# Altium PCB ife19_TS_Charger.PcbDoc
Units mm, origin at the board's own origin, x right, y up, seen from the top; angles counter-clockwise.
Board outline 49.3 x 31.29 mm, 2 copper layers (Top Layer, Bottom Layer); 23 components, 18 nets, 89 pads, 34 vias.
Unrouted connection lines stored in the file: 3.
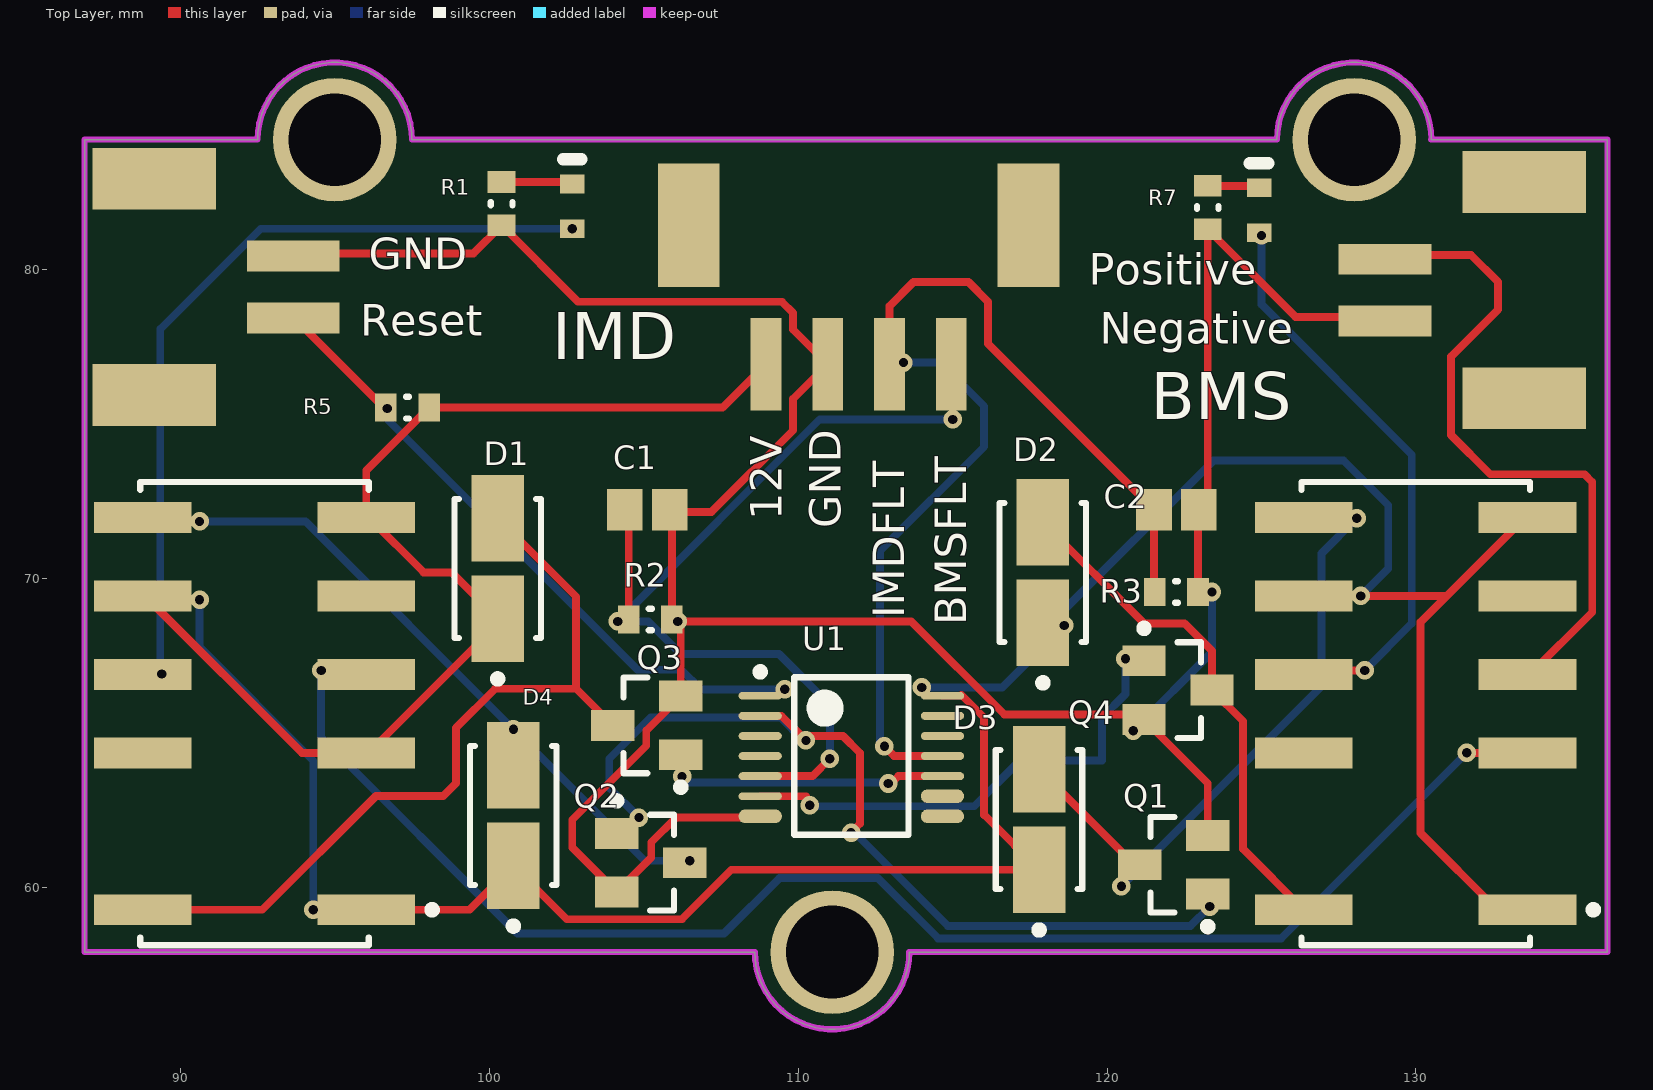
[diagram p0: Top Layer view]
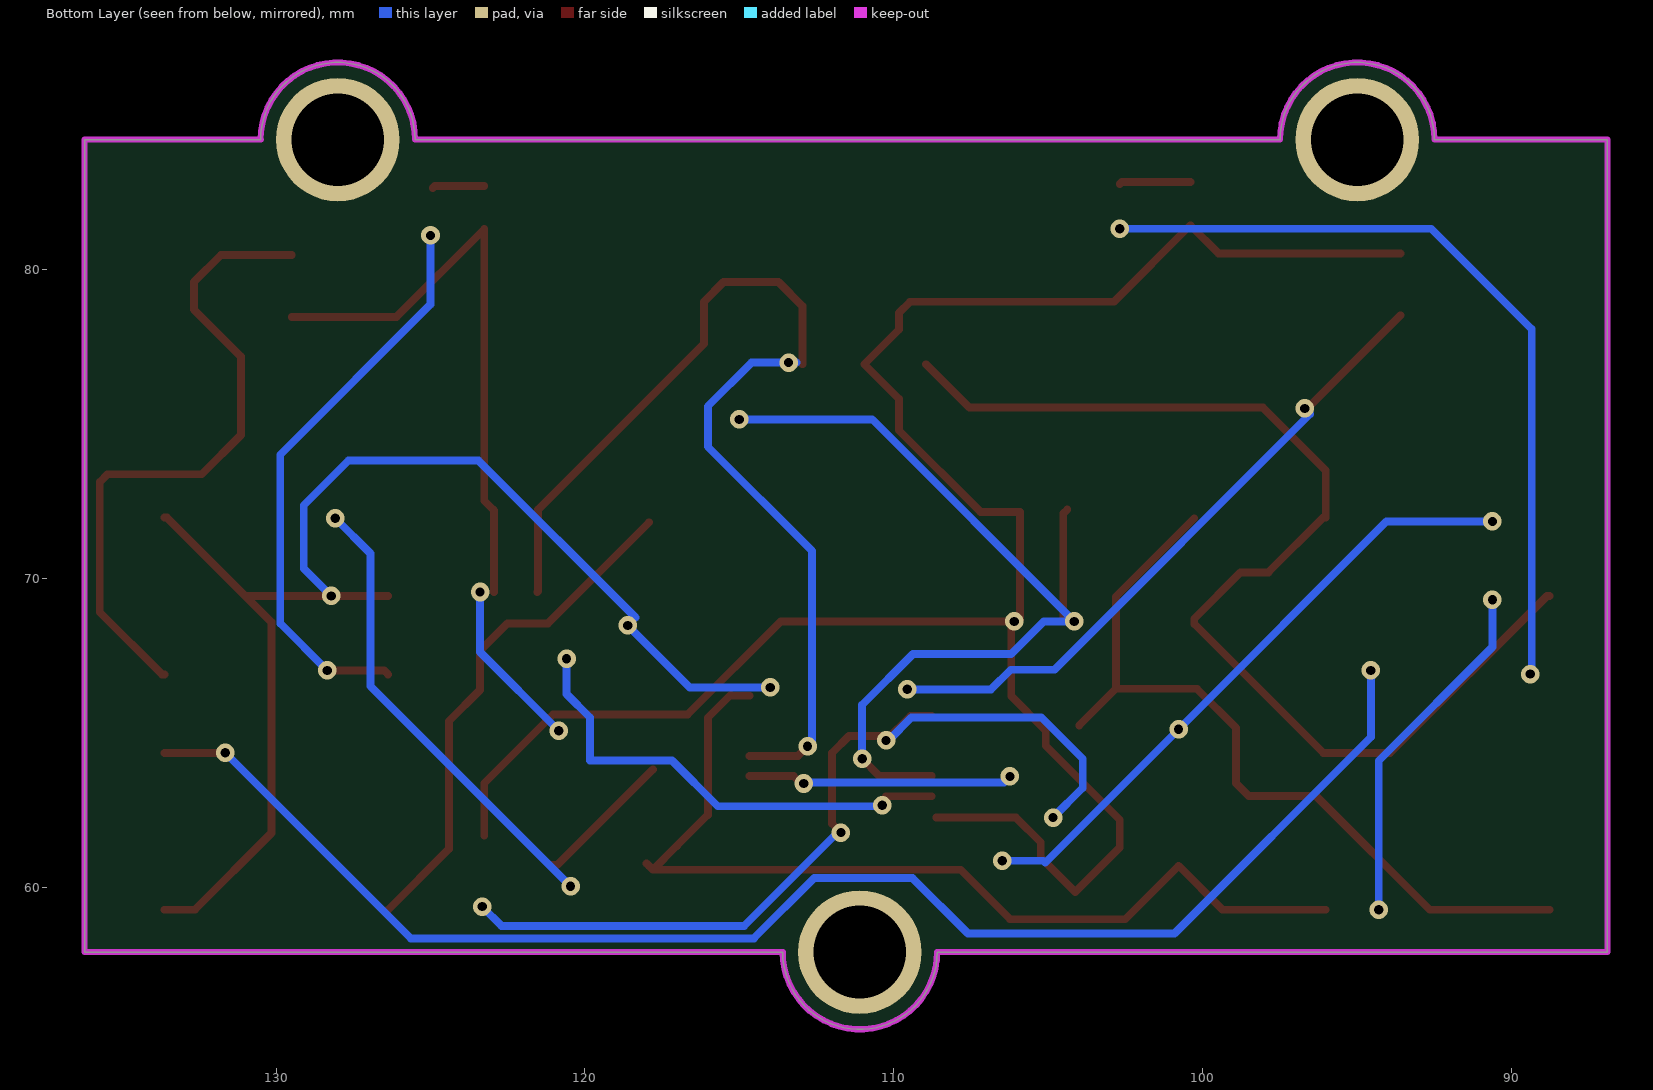
[diagram p1: Bottom Layer view, seen from below]

## Layer stack, top to bottom
Top Solder: solder mask 0.0102, Solder Resist, Dk 3.5
Top Layer: signal copper 0.0356
Dielectric 1: dielectric 0.32, FR-4, Dk 4.8
Bottom Layer: signal copper 0.0356
Bottom Solder: solder mask 0.0102, Solder Resist, Dk 3.5

## Board outline
86.9,57.9 86.9,84.2 92.5,84.2 cw(c95,84.2) 97.5,84.2 125.5,84.2 cw(c128,84.2) 130.5,84.2 136.2,84.2 136.2,57.9 113.6,57.9 cw(c111.1,57.9) 108.6,57.9

## Design rules (kind name [scope] priority, off if disabled: settings)
BoardOutlineClearance [All] p1: gap=0.2 ignorepadtopadclearanceinfootprint=FALSE
Clearance [All] p1: gap=0.152 ignorepadtopadclearanceinfootprint=FALSE
HoleSize [All] p1: absolutevalues=TRUE maxlimit=5 minlimit=0.3 maxpercent=80.000 minpercent=20.000
MinimumAnnularRing [All] p1: minimumring=0.076
PolygonConnect [All] p1: connectstyle=Relief reliefconductorwidth=0.254 reliefentries=4 polygonreliefangle="90 Angle" airgapwidth=0.254
RoomDefinition ife19_TS_Charger [InComponentClass('ife19_TS_Charger')] p1: confinementstyle=ConfineIn formatcopy=TRUE lockcomponents=FALSE outline 86.876,57.928 136.152,57.928 136.152,84.074 86.876,84.074
RoutingVias [All] p1: holewidth=0.711 width=1.27 viastyle="Through Hole" minholewidth=0.3 minwidth=0.6 maxholewidth=0.3 maxwidth=0.6
SolderMaskExpansion [All] p1: expansion=0.102
Width [All] p1: maxlimit=0.254 minlimit=0.254 preferedwidth=0.254
29 further rules are at their usual default settings.

## Components (designator, comment, footprint, x,y, rotation, side; value= is the part's Value field where it differs from the comment)
12V "Molex 505575-04 4 Position 2.00mm pitch connector wire to board connector Datasheet" 505575-04 111.959,77.43 r0 top (schematic designator 2)
BMS "TXS2SA-LT-12V-Z" PNSC-TXS2SA-L2_V 129.993,65.619 r90 top (schematic designator K2)
C1 "08055C104JAT2A" CAPC2013X94X50LL20T25 105.114,72.223 r0 top
C2 "08055C104JAT2A" CAPC2013X94X50LL20T25 122.246,72.223 r0 top
D1 "SMAJ12A-E3/5A" VISH-DO-214AC-2_M 100.275,70.318 r90 top
D2 "SMAJ12A-E3/5A" VISH-DO-214AC-2_M 117.924,70.191 r90 top
D3 "SMAJ12A-E3/5A" VISH-DO-214AC-2_M 117.799,62.19 r90 top
D4 "SMAJ12A-E3/5A" VISH-DO-214AC-2_M 100.783,62.317 r90 top
GND "Molex 505575-02 2 Position 2.00mm pitch connector wire to board connector Datasheet" 505575-02 93.154,79.431 r90 top (schematic designator 3)
IMD "TLMY1100-GS08" VISH-TLMX1100-2_V 102.688,82.039 r90 top (schematic designator DS1)
Negative "TLMY1100-GS08" VISH-TLMX1100-2_V 124.926,81.912 r90 top (schematic designator DS2)
Positive "Molex 505575-02 2 Position 2.00mm pitch connector wire to board connector Datasheet" 505575-02 129.5,79.329 r270 top (schematic designator 1)
Q1 "DMN6140L-7" FAIR-SOT23-3_V 122.162,60.727 r180 top
Q2 "DMN6140L-7" FAIR-SOT23-3_V 105.228,60.793 r0 top
Q3 "DMN6140L-7" FAIR-SOT23-3_V 105.101,65.238 r180 top
Q4 "DMN6140L-7" FAIR-SOT23-3_V 122.296,66.381 r0 top
R1 "510 1% 0603(1608)" RESC0603(1608)_L 100.402,82.129 r90 top value="249000.00 Ohm"
R2 "10K 1% 0603(1608)" RESC0603(1608)_L 105.215,68.667 r180 top value="249000.00 Ohm"
R3 "10K 1% 0603(1608)" RESC0603(1608)_L 122.246,69.556 r180 top value="249000.00 Ohm"
R5 "1k 1% 0603(1608)" RESC0603(1608)_L 97.354,75.525 r180 top value="249000.00 Ohm"
R7 "510 1% 0603(1608)" RESC0603(1608)_L 123.262,82.002 r90 top value="249000.00 Ohm"
Reset "TXS2SA-LT-12V-Z" PNSC-TXS2SA-L2_V 92.401,65.619 r90 top (schematic designator K1)
U1 "CD4069UBPWR" PW0014A_N 111.722,64.246 r0 top

## Footprints (in the part's own frame and the unit in brackets; to place one, negate y for a bottom-side part, rotate by r counter-clockwise, add the part's x,y. Pads: shape width x height; smd on the part's side, far side on the other; paste and mask are expansions set on the pad)
505575-02 [mm]
  rect 1x3 smd: 1(-1,-0.5) 2(1,-0.5)
  rect 2x4 smd: P$3(-3.5,4) P$4(3.5,4)
505575-04 [mm]
  rect 1x3 smd: 1(-3,-0.5) 2(-1,-0.5) 3(1,-0.5) 4(3,-0.5)
  rect 2x4 smd: P$3(-5.5,4) P$4(5.5,4)
CAPC2013X94X50LL20T25 [mm] "Chip Capacitor, 2-Leads, Body 2.21x1.45mm, IPC High Density"
  rect 1.15x1.35 smd: 1(-0.725,0) 2(0.725,0)
  body extent -1.1,-0.72 1.1,0.72, height 0.94
FAIR-SOT23-3_V [mm] "SOT23, 3-Leads, Body 3.12x1.5mm, Pitch 0.95mm"
  rect 1.4x1 smd: 1(-1.1,0.95) 2(-1.1,-0.95) 3(1.1,0)
  silkscreen extent -1.23,-1.55 0.75,2.12, body extent -1.35,-1.56 1.35,1.56, height 1.2
PNSC-TXS2SA-L2_V [mm] "SMD, 10-Leads, Body 15x7.4mm, Pitch 2.54mm"
  rect 1x3.16 smd: 1(-6.35,-3.62) 3(-1.27,-3.62) 4(1.27,-3.62) 5(3.81,-3.62) 6(6.35,-3.62) 7(6.35,3.62) 8(3.81,3.62) 9(1.27,3.62) 10(-1.27,3.62) 12(-6.35,3.62)
  silkscreen extent -7.5,-5.88 7.5,3.7
PW0014A_N [mm] "SOP, 14-Leads, Body 5.1x4.5mm, Pitch 0.65mm, IPC Medium Density"
  oval 1.4x0.254 smd: 1(-2.95,1.95) 2(-2.95,1.3) 3(-2.95,0.65) 4(-2.95,0) 5(-2.95,-0.65) 6(-2.95,-1.3) 10(2.95,-0.65) 11(2.95,0) 12(2.95,0.65) 13(2.95,1.3) 14(2.95,1.95)
  oval 1.4x0.45 smd: 7(-2.95,-1.95) 8(2.95,-1.95) 9(2.95,-1.3)
  silkscreen extent -3.07,-2.55 1.85,2.85, body extent -3.21,-2.5 3.21,2.5, height 1
RESC0603(1608)_L [mm] "Chip Resistor, Body 1.6x0.8mm, IPC High Density"
  rect 0.7x0.9 smd: 1(-0.7,0) 2(0.7,0)
  silkscreen extent -0.05,-0.35 0.05,0.35, body extent -0.85,-0.47 0.85,0.47, height 0.6
VISH-DO-214AC-2_M [mm] "DO-214AC, 2-Leads, Body 4.5x2.79mm, IPC Low Density"
  rect 2.8x1.7 smd: 1(-1.625,0) 2(1.625,0)
  silkscreen extent -3.7,-1.4 2.25,1.4, body extent -2.25,-1.39 2.25,1.4, height 2.29
VISH-TLMX1100-2_V [mm] "SMD, 2-Leads, Body 1.6x0.8mm"
  rect 0.6x0.8 smd: 1(-0.725,0) 2(0.725,0)
  silkscreen extent 1.53,-0.3 1.53,0.3, body extent -0.8,-0.4 0.8,0.4, height 0.65

## Part data
12V: library part 505575-04, DeviceSetName=505575-04, GateName_1=G$1, LibraryName="MOLEX Micro-Lock", Package=505575-04, SymbolName_1=4POS
BMS Reset: library part CMP-2000-07338-1, "Very High Sensitivity, Relay, 70 mW, 3 V, 10-Pin SMD, RoHS, Tape and Reel", Coil Current=23.3mA, Coil Power=70mW, Coil Resistance=129Ohms, Coil Voltage=3VDC, Contact Rating (Current)=1A, Manufacturer=Panasonic, Operating Temperature=-40°C~70°C, Package Description="10-Pin Surface Mount Device, Body 15 x 7.4 mm, Pitch 2.54 mm", Package Reference=TXS2SA-L2, Standard Package=500, Switching Voltage=110VDC-Max, Turn On Voltage (Max)=2.4VDC, Catalog Drawings="TX,TXSSeriesSMD /  / TX,TXSSeriesCircuitL2", Category=Relays, Coil Type=Latching,DualCoil, Contact Form=DPDT(2FormC), Contact Material=Silver(Ag),Gold(Au), Datasheet URL=http://www.panasonic-electric-works.com/eu-asset/en/downloads/ds_61022_en_txs.pdf, Datasheet Version=02/2014, Dynamic Catalog=TX-SSeries, Family=SignalRelays,Upto2Amps, Features=Sealed-Fully, Manufacturer URL=http://www.panasonic.com/, Mounting Technology=SurfaceMount, Mounting Type=SurfaceMount, Operate Time=5ms, Other Names="255-2347-2 / TXS2SA-L2-3V-Z-ND", Other Related Documents="RelayTechnicalInfo /  / StandardsChart /  / HowtoReadDateCodes", Packaging=Tape&Reel(TR), Relay Type=GeneralPurpose, Release Time=5ms, Series=TX-S, Termination Style=GullWing
C1 C2: library part CMP-2000-05808-1, "Chip Capacitor, 0.1 uF, +/- 5%, 50 V, -55 to 125 degC, 0805 (2012 Metric), RoHS, Tape and Reel", Capacitance=0.1uF, Capacitance - nF=100nF, Capacitance - pF=100000pF, Case Code - in=0805, Case Code - mm=2012, Case Height=0.94mm, Case Length=2.01mm, Case Width=1.25mm, Dielectric=X7R, Manufacturer=AVX, Maximum Operating Temperature=+125C, Minimum Operating Temperature=-55C, Operating Temperature Range=-55Cto+125C, Package / Case=0805(2012metric), Package Description="2-Pin Surface Mount Device, Body 2.01 x 1.25 mm", Temperature Coefficient / Code=+/-15%, Tolerance=5%, Voltage Rating=50V, Brand=AVX, Datasheet URL=http://www.farnell.com/datasheets/1679506.pdf, Datasheet Version=11/2012, Dimensions=1.25mmWx2.01mmLx0.94mmH, Dissipation Factor DF=2.5, Factory Pack Quantity=4000, Manufacturer URL=http://www.avx.com/, Mounting Technology=SurfaceMount, Package Reference=0805, Packaging=Reel, Product=GeneralTypeMLCCs, Product Category=MultilayerCeramicCapacitorsMLCC-SMD/SMT, RoHS=Details, Termination Style=SMD/SMT, Type=StandardX7RMLCCs, Voltage Rating DC=50V
D1 D2 D3 D4: library part CMP-0548-00315-2, "Transient Voltage Suppressor, 6.40 to 231 V, 12 V Stand-off Voltage, Uni-Directional, -55 to 155 degC, 2-pin DO-214AC, Pb-Free, Tape and Reel", Manufacturer="Vishay Semiconductor", Operating Junction and Storage Temperature Range="-55 to 150 degC", ComponentLink1Description="Manufacturer URL", ComponentLink1URL=http://www.vishay.com/, ComponentLink2Description=Datasheet, ComponentLink2URL=http://www.vishay.com/docs/88390/smaj50a.pdf, ComponentLink3Description="Package Specification", ComponentLink3URL=http://www.vishay.com/docs/88390/smaj50a.pdf, DatasheetVersion=12/8/2013, ID (uA)=1, IFSM="40 A", Mounting Technology="Surface Mount", PackageDescription="2-Pin DO-214AC (SMA), Body 4.245 x 2.665 mm", PackageReference=DO-214AC-2, Packing="Tape and Reel", PartNumber=SMAJ12A-E3/5A, PPPM (W)="400, 300", RoHS=TRUE, VBR Uni-Directional (V)="6.4 to 231", VWM (V)=12
GND Positive: library part 505575-02, DeviceSetName=505575-02, GateName_1=G$1, LibraryName="MOLEX Micro-Lock", Package=505575-02, SymbolName_1=2POS
IMD Negative: library part CMP-1666-00030-1, "Yellow LED, 20 mA, 2.1 V, -40 to 100 degC, 2-Pin SMD (0603), RoHS, Tape and Reel", ComponentLink1Description="Manufacturer URL", ComponentLink1URL=http://www.vishay.com/, ComponentLink2Description=Datasheet, ComponentLink2URL=http://download.siliconexpert.com/pdfs/2016/8/7/12/43/26/667/vsh_/manual/379263299541529tlmb1100.pdf, DatasheetVersion="Rev. 2.7, 03/2016", PackageDescription="2-Pin Surface Mount Device, Body 1.6 x 0.8 mm", PackageReference=0603
Q1 Q2 Q3 Q4: library part CMP-1670-00009-1, "N-Channel Logic Level Enhancement Mode Field Effect Transistor, 220 mA, 50 V, -55 to 150 degC, 3-Pin SOT-23, RoHS, Tape and Reel", Capacitance="1.8E-11 f", Frequency="12 MHz", Frequency Tolerance=30ppm, Load Capacitance="18 pF", Max Operating Temperature=70degC, Min Operating Temperature=-20degC, Package Quantity=1, Resistance="100 Ohm", ComponentLink1Description="Manufacturer URL", ComponentLink1URL=https://www.fairchildsemi.com/, ComponentLink2Description=Datasheet, ComponentLink2URL=https://www.fairchildsemi.com/datasheets/BS/BSS138.pdf, ComponentLink3Description="Package Specification", ComponentLink3URL=http://www.fairchildsemi.com/dwg/MA/MA03D.pdf, DatasheetVersion="Rev. C, 10/2005", ESR="40 Ohm", Height="0.041 inch", Length="0.197 inch", Mount="Surface Mount", PackageDescription="3-Pin Small Outline Transistor, Body 2.92 x 1.325 mm, Pitch 0.95 mm", PackageReference=SOT23-3, Packaging="Tape and Reel", Pins=4, REACH SVHC=Unknown, RoHSCompliant=True, Tolerance=30ppm, Width="0.126 inch"
R1 R2 R3 R5 R7: library part CMP-1012-00779-1, "249K 0.1W 1% 0603 (1608 Metric)  SMD", Case-EIA=0603, Case-Metric=1608, Power="0.1 W", Tolerance="1 %", Technology=SMT
U1: library part CMP-1615-00092-1, "CMOS Hex Inverter, PW0014A, LARGE T&R", F @ Nom Voltage(Max)(Mhz)=12, Generic Part Number=CD4069UB, ICC @ Nom Voltage(Max)(mA)=0.0075, Manufacturer="Texas Instruments", Operating Temperature Range(C)="-55 to 125", Rating=Catalog, tpd @ Nom Voltage(Max)(ns)=110, Voltage(Nom)(V)=5, Bits(#)=6, Code_JEDEC=MO-153, ComponentLink1Description="Manufacturer URL", ComponentLink1URL=http://www.ti.com/, ComponentLink2Description=Datasheet, ComponentLink2URL=http://www.ti.com/lit/ds/symlink/cd4069ub.pdf, ComponentLink3Description="Package Specification", ComponentLink3URL=http://www.ti.com/lit/ml/mpds360/mpds360.pdf, DatasheetVersion=SCHS054C, Input Type=CMOS, Output Drive (IOL/IOH)(Max)(mA)=-1/1, Output Type=CMOS, PackageReference=PW0014A, PartId=1, PartNumber=CD4069UBPWR, Schmitt Trigger=No, Technology Family=CD4000, VCC(Max)(V)=18, VCC(Min)(V)=3

## Free pads (board coordinates)
  round 4 hole 3: 3(95,84.2) 4(111.1,57.9) 5(128,84.2)

## Via types
v1: diameter 0.6, hole 0.3, Top Layer to Bottom Layer, 34 vias

## Nets (pads, with @x,y where several pads share a name; then routed paths per layer and width w, separated by ;. In a path a pad name is that pad's centre, name@x,y a point inside that pad or via, vN(x,y) a via of type N, cw(c..) or ccw(c..) an arc to the next point about the centre after c; other vN are vias at no path point)
12V: 12V.1 BMS.1 BMS.6 BMS.8 D1.1 D2.1 D3.1 D4.1 R5.1 Reset.1 Reset.3 Reset.6 Reset.8 U1.14 | length 123.1
  Top Layer w0.254: Reset.8 88.86,69.429 93.94,64.349 Reset.3 96.1,64.349 100.275,68.524 D1.1 98.777,70.191 97.878,70.191 96.1,71.969 Reset.6 96.021,73.492 R5.1 107.554,75.525 12V.1 ; Reset.1 99.36,59.269 D4.1 102.513,58.962 106.236,58.962 107.839,60.565 D3.1 ; U1.14 U1.14@115.245,66.196 ; U1.14@115.279,66.23 116.023,65.487 116.023,62.341 117.025,61.339 D3.1 ; D3.1@117.924,60.69 D3.1 ; D3.1@118.005,60.772 D3.1 ; BMS.8 v1(128.215,69.429) 130.994,69.429 ; BMS.1 132.628,59.269 130.145,61.752 130.145,68.58 130.994,69.429 ; BMS.6 133.534,71.969 130.994,69.429
  Bottom Layer w0.254: v1(90.623,69.302) 90.623,67.778 94.306,64.095 v1(94.306,59.269) ; v1(114.001,66.467) 116.61,66.467 v1(118.618,68.475) ; 118.364,68.729 123.444,73.809 127.659,73.809 129.104,72.364 129.104,70.318 v1(128.215,69.429)
BMS: Q4.1 U1.6 | length 15.3
  Top Layer w0.254: U1.6 110.253,62.946
  Bottom Layer w0.254: v1@110.38,62.496 v1(110.38,62.657) 110.416,62.621 115.698,62.621 117.18,64.102 119.833,64.102 119.833,65.49 120.595,66.252 v1(120.595,67.397)
BMSFLT: 12V.4 C1.1 R2.2 U1.5 | length 29.4
  Top Layer w0.254: C1.1 104.515,72.097 R2.2 ; U1.5 110.464,63.596 v1(111.026,64.159)
  Bottom Layer w0.254: v1(111.026,64.159) 111.026,65.905 109.381,67.55 106.204,67.55 105.151,68.603 v1(104.164,68.603) 110.705,75.144 v1(115.007,75.144)
BMSLED: BMS.9 Negative.1 | length 18.8
  Top Layer w0.254: BMS.9 126.5,67.016 v1(128.342,67.016)
  Bottom Layer w0.254: v1(125,81.1) 125,78.867 129.866,74.001 129.866,68.54 v1(128.342,67.016)
GND: 12V.2 C1.2 C2.2 GND.2 pad.3 pad.4 pad.5 Positive.2 Q1.2 Q2.2 Q3.2 Q4.2 R1.1 R2.1 R3.1 R7.1 U1.7 | length 93.6
  Top Layer w0.254: GND.2@93.599,80.518 99.491,80.518 R1.1 102.877,78.954 109.474,78.954 109.84,78.588 109.84,78.049 12V.2 109.84,75.811 109.84,74.795 107.192,72.147 105.915,72.147 R2.1 106.201,68.381 Q3.2 105.082,65.069 105.082,64.58 102.688,62.186 102.688,61.283 Q2.2 105.247,60.962 105.247,61.451 106.051,62.255 U1.7@108.628,62.255 ; v1(106.1,68.603) 113.663,68.603 116.671,65.596 121.031,65.596 Q4.2 ; Q4.2@121.203,65.424 123.262,63.365 Q1.2 ; R3.1 122.946,72.198 C2.2 123.262,72.514 R7.1 126.102,78.462 Positive.2@129.493,78.462
  Bottom Layer w0.254: v1(120.849,65.069) 123.396,67.616 v1(123.396,69.556)
IMD: Q3.1 U1.10 | length 8.6
  Top Layer w0.254: v1(112.92,63.357) 113.002,63.357 113.241,63.596 U1.10
  Bottom Layer w0.254: v1(106.244,63.587) 106.437,63.394 112.883,63.394 v1(112.92,63.357)
IMDFLT: 12V.3 C2.1 R3.2 U1.11 | length 35.2
  Top Layer w0.254: v1(112.793,64.562) 113.109,64.246 U1.11 ; 12V.3 112.959,78.811 113.737,79.589 115.515,79.589 116.15,78.954 116.15,77.594 C2.1 121.521,69.581 R3.2
  Bottom Layer w0.254: v1@112.649,64.562 112.649,70.888 116.023,74.262 116.023,75.565 114.604,76.984 v1(113.411,76.984) v1@113.157,76.984
IMDLED: IMD.1 Reset.9 | length 25.9
  Bottom Layer w0.254: v1(89.4,66.9) 89.353,66.947 89.353,78.065 92.602,81.314 v1(102.688,81.314)
Net1_1: BMS.4 Positive.1 | length 21.5
  Top Layer w0.254: Positive.1@129.493,80.462 131.787,80.462 132.66,79.589 132.66,78.7 131.136,77.176 131.136,74.636 132.406,73.366 135.454,73.366 135.708,73.112 135.708,68.905 133.692,66.889 BMS.4
NetD1_2: D1.2 Q3.3 Reset.12 | length 26.3
  Top Layer w0.254: Reset.12 92.655,59.269 96.338,62.952 98.512,62.952 98.925,63.365 98.925,65.158 100.191,66.424 102.815,66.424 ; D1.2 102.815,69.403 102.815,66.424 ; Q3.3 102.815,66.424
NetD2_2: BMS.12 D2.2 Q4.3 | length 16.8
  Top Layer w0.254: D2.2 121.2,68.54 122.507,68.54 123.396,67.651 Q4.3 124.405,65.372 124.405,61.237 BMS.12
NetD3_2: BMS.7 D3.2 Q1.3 | length 19.6
  Top Layer w0.254: D3.2 120.887,60.727 Q1.3
  Bottom Layer w0.254: v1(120.468,60.031) 126.945,66.508 126.945,70.8 v1(128.088,71.943)
NetD4_2: D4.2 Q2.3 Reset.7 | length 20.5
  Bottom Layer w0.254: v1(90.623,71.842) 94.052,71.842 v1(100.783,65.111) 105.101,60.793 105.163,60.855 v1(106.491,60.855)
NetDS1_2: IMD.2 R1.2 | length 2.3
  Top Layer w0.254: R1.2 102.623,82.829 IMD.2
NetDS2_2: Negative.2 R7.2 | length 1.7
  Top Layer w0.254: R7.2 124.861,82.702 Negative.2
NetK1_4: BMS.3 Reset.4 | length 47.9
  Top Layer w0.254: v1(131.644,64.349) BMS.3
  Bottom Layer w0.254: v1(94.56,67.016) 94.56,64.857 100.917,58.5 107.601,58.5 109.401,60.3 112.576,60.3 114.533,58.343 125.638,58.343 v1(131.644,64.349)
RES: Q1.1 Q2.1 U1.2 | length 29.1
  Top Layer w0.254: U1.2 109.457,65.546 v1(110.253,64.75) 110.398,64.896 111.453,64.896 112,64.349 112,62.053 v1(111.715,61.768)
  Bottom Layer w0.254: v1(104.847,62.255) 103.886,63.216 103.886,64.157 105.227,65.499 109.428,65.499 110.176,64.75 v1(110.253,64.75) ; v1@111.785,61.809 114.845,58.749 122.702,58.749 v1(123.325,59.372)
RESET: GND.1 R5.2 U1.1 | length 21.3
  Top Layer w0.254: GND.1@93.599,78.518 96.592,75.525 R5.2
  Bottom Layer w0.254: v1(96.7,75.5) 96.522,75.322 104.802,67.042 106.218,67.042 106.855,66.405 v1(109.563,66.405)
pads on no net: 12V.P$3 12V.P$4 BMS.5 BMS.10 GND.P$3 GND.P$4 Positive.P$3 Positive.P$4 Reset.5 Reset.10 U1.3 U1.4 U1.8 U1.9 U1.12 U1.13

## Keep-outs
Keep-Out Layer:
  the board outline again, w0.2

## Silkscreen, mask and mechanical layers (free items; w line width, h text height)
Top Overlay:
  text "GND" at 111.379,71.628 h1.02 r90
  text "IMDFLT" at 113.428,68.707 h1.02 r90
  text "BMSFLT" at 115.443,68.475 h1.02 r90